# Altium PCB Tiny Mic.PcbDoc
Units mil, origin at the board's own origin, x right, y up, seen from the top; angles counter-clockwise.
Board outline 6000 x 4000 mil, 2 copper layers (Top Layer, Bottom Layer); 35 components, 28 nets, 157 pads, 0 vias.
Unrouted connection lines stored in the file: 82.
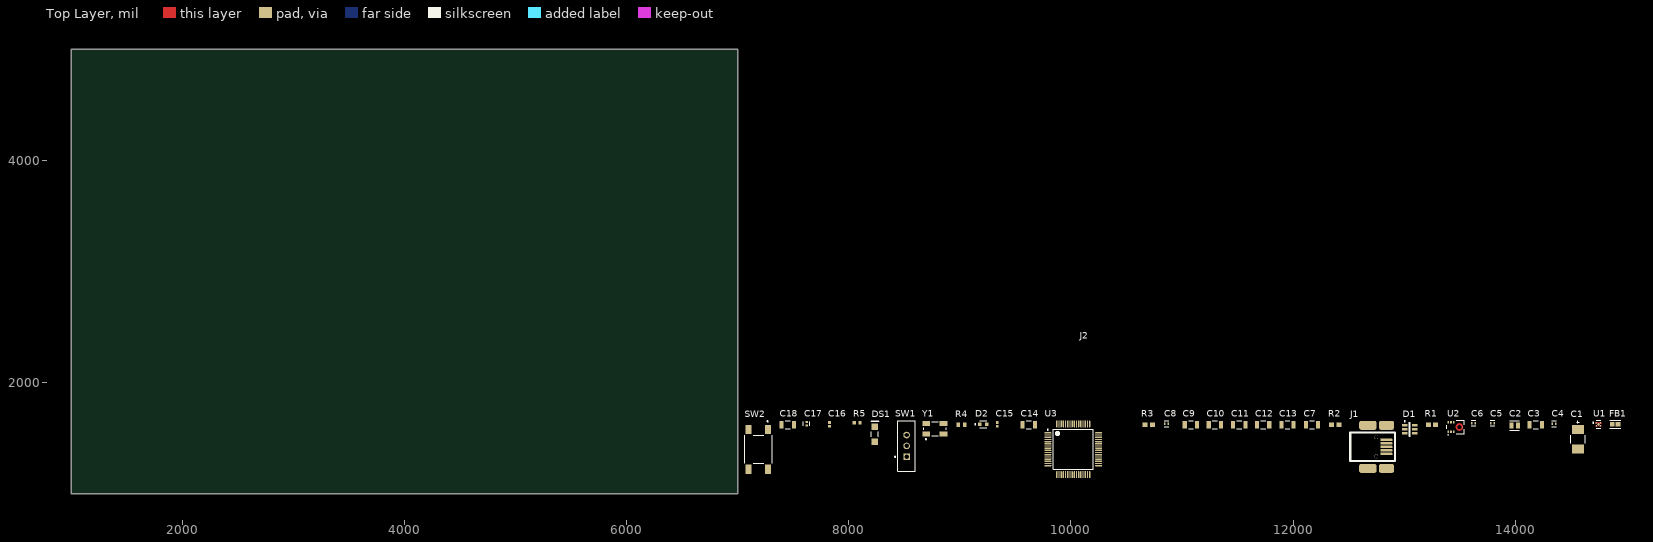
[diagram p0: Top Layer view]
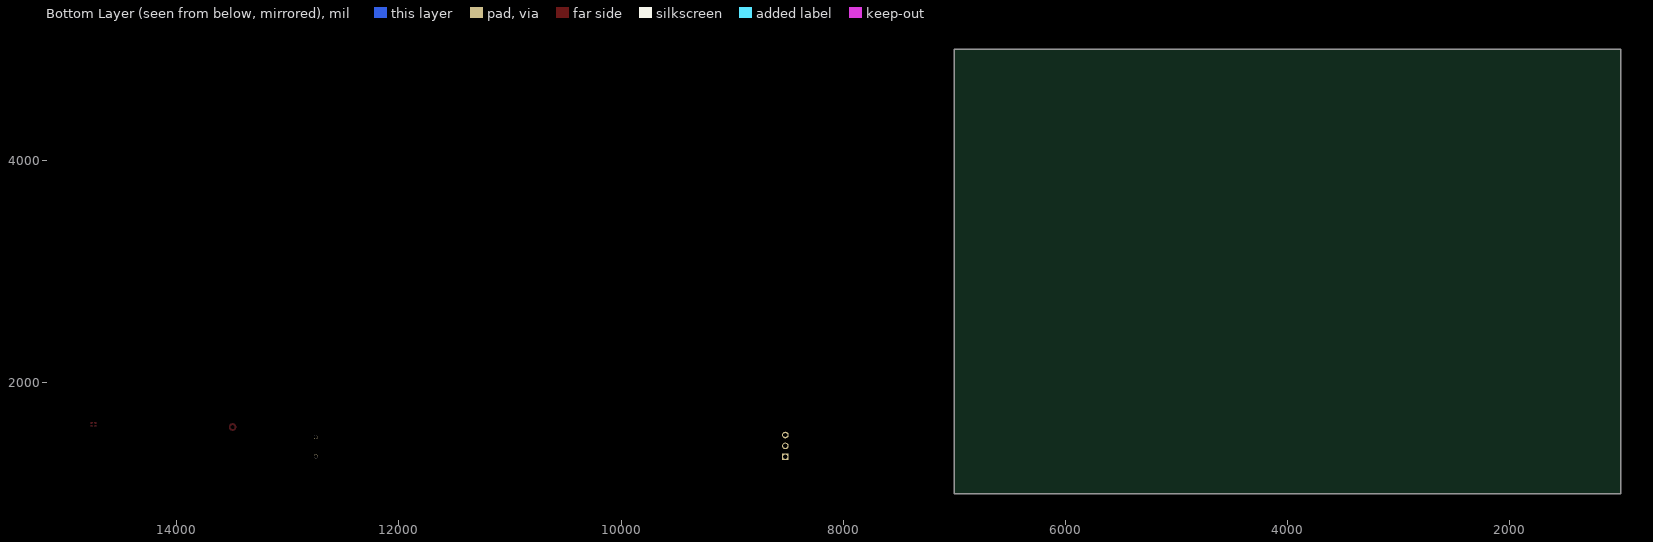
[diagram p1: Bottom Layer view, seen from below]

## Layer stack, top to bottom
Top Solder: solder mask 0.4, Solder Resist, Dk 3.5
Top Layer: signal copper 1.4
Dielectric 1: dielectric 12.6, FR-4, Dk 4.8
Bottom Layer: signal copper 1.4
Bottom Solder: solder mask 0.4, Solder Resist, Dk 3.5

## Board outline
1000,1000 7000,1000 7000,5000 1000,5000

## Design rules (kind name [scope] priority, off if disabled: settings)
Clearance [All] p1: gap=10 ignorepadtopadclearanceinfootprint=FALSE except(0: Arc-Hole Track-Hole SMDPad-Hole THPad-Hole Via-Hole Fill-Hole Poly-Hole Region-Hole Text-Hole)
PolygonConnect [All] p1: connectstyle=Relief reliefconductorwidth=10 reliefentries=4 polygonreliefangle="90 Angle" airgapwidth=10
RoutingVias [All] p1: holewidth=28 width=50 viastyle="Through Hole" minholewidth=28 minwidth=50 maxholewidth=28 maxwidth=50
SolderMaskExpansion [All] p1: expansion=4 istentingtop=FALSE
Width [All] p1: maxlimit=10 minlimit=10 preferedwidth=10
30 further rules are at their usual default settings.

## Components (designator, comment, footprint, x,y, rotation, side; value= is the part's Value field where it differs from the comment)
C1 "22uF" FP-TAJC-MFG 14565,1490 r90 top
C2 "10n" FP-C0805C-DN-MFG 13995,1615 r0 top value="10,000 pF"
C3 "100n" FP-C1206C-EB-MFG 14185,1620 r0 top value="0.10 μF"
C4 "4.7uF" FP-C1005-050-0_15-MFG 14350,1630 r0 top
C5 "1uF" FP-GRM15-0_1-MFG 13795,1635 r0 top
C6 "1uF" FP-GRM15-0_1-MFG 13625,1635 r0 top
C7 "100n" FP-C1206C-EB-MFG 12170,1620 r0 top value="0.10 μF"
C8 "4.7uF" FP-C1005-050-0_15-MFG 10860,1630 r0 top
C9 "100n" FP-C1206C-EB-MFG 11080,1620 r0 top value="0.10 μF"
C10 "100n" FP-C1206C-EB-MFG 11295,1620 r0 top value="0.10 μF"
C11 "100n" FP-C1206C-EB-MFG 11515,1620 r0 top value="0.10 μF"
C12 "100n" FP-C1206C-EB-MFG 11730,1620 r0 top value="0.10 μF"
C13 "100n" FP-C1206C-EB-MFG 11950,1620 r0 top value="0.10 μF"
C14 "100n" FP-C1206C-EB-MFG 9620,1620 r0 top value="0.10 μF"
C15 "22pF" CAPC1005X55X25NL05T10 9335,1625 r90 top
C16 "22pF" CAPC1005X55X25NL05T10 7825,1625 r90 top
C17 "4.7uF" FP-C1005-050-0_15-MFG 7620,1630 r90 top
C18 "100n" FP-C1206C-EB-MFG 7450,1620 r0 top value="0.10 μF"
D1 "ESD Protection" STM-SOT23-6L_V 13050,1580 r0 top
D2 "GREEN" FP-LTST-C190GKT-MFG 9210,1625 r0 top
DS1 "RED" AVAG-HSMX-C150_V 8235,1535 r90 top
FB1 "BLM18PG221SN1D" FP-BLM18-0_15-t0_8-IPC_B 14900,1625 r0 top
J1 "USB Connector" MOLX-67503-1020_V 12840,1485 r0 top
J2 "XHP-5" FP-XHP-5-MFG 10370,2245 r0 top
R1 "100k" RESC1609X55X30ML10T20 13250,1620 r0 top
R2 "100k" RESC1609X55X30ML10T20 12380,1620 r0 top
R3 "100k" RESC1609X55X30ML10T20 10700,1620 r0 top
R4 "150" RESC1608X55X25ML10T15 9015,1620 r0 top
R5 "330" RESC1608X55X30LL15T15 8075,1640 r0 top
SW1 "EG1218" ESWI-EG1218_V 8520,1430 r90 top
SW2 "" FP-FSM2JSMAA-MFG 7185,1400 r0 top
U1 "LP5907SNX-3.3/NOPB" FP-DQN0004A-MFG 14750,1625 r0 top
U2 "Low Noise Microphone" INSE-ICS-43432_V 13460,1600 r0 top
U3 "STM32F446RCT6" STM-LQFP64_L 10020,1400 r0 top
Y1 "ABM3B-8.000MHZ-B2-T" FP-ABM3B-MFG 8775,1585 r0 top

## Footprints (in the part's own frame and the unit in brackets; to place one, negate y for a bottom-side part, rotate by r counter-clockwise, add the part's x,y. Pads: shape width x height; smd on the part's side, far side on the other; paste and mask are expansions set on the pad)
AVAG-HSMX-C150_V [mm] "SMD, 2-Leads, Body 3.2x1.6mm"
  rect 1.5x1.5 smd: 1(-1.75,0) 2(1.75,0)
  silkscreen extent -0.6,-0.8 3,0.8, body extent -1.6,-0.8 1.6,0.8, height 1.1
CAPC1005X55X25NL05T10 [mm] "Chip Capacitor, 2-Leads, Body 1.00x0.50mm, IPC Medium Density"
  rect 0.66x0.62 smd: 1(-0.44,0) 2(0.44,0)
  body extent -0.53,-0.28 0.53,0.27, height 0.55
ESWI-EG1218_V [mm] "THD, 3-Leads, Body 11.6x4mm, Pitch 2.5mm"
  rect 1.5x1.5 hole 1: 1(-2.5,0)
  round 1.5 hole 1: 2(0,0) 3(2.5,0)
  silkscreen extent -5.8,-2 5.8,2.77, body extent -5.8,-2 5.8,2, height 7.4
FP-ABM3B-MFG [mm]
  rect 1.8x1.2 smd paste+0 mask+0: 1(-2,-1.2) 2(2,-1.2) 3(2,1.2) 4(-2,1.2)
  silkscreen extent -2.55,-2.5 2.55,1.65, body extent -3,-1.9 3,1.9, height 0.25
FP-BLM18-0_15-t0_8-IPC_B [mil]
  rect 43.55x37.73 smd paste+0 mask+0: 1(-26.62,0) 2(26.62,0)
  silkscreen extent -48,-35 48,35, body extent -58,-29 58,29, height 10
FP-C0805C-DN-MFG [mm]
  rect 0.95x1.35 smd paste+0 mask+0: 1(-0.75,0) 2(0.75,0)
  silkscreen extent -1.1,-1.07 1.1,1.07, body extent -1.4,-0.85 1.4,0.85, height 0.25
FP-C1005-050-0_15-MFG [mm]
  rect 0.4x0.5 smd paste+0 mask+0: 1(-0.4,0) 2(0.4,0)
  silkscreen extent -0.5,-0.72 0.5,0.72, body extent -0.7,-0.43 0.7,0.43, height 0.25
FP-C1206C-EB-MFG [mm]
  rect 0.95x1.7 smd paste+0 mask+0: 1(-1.4,0) 2(1.4,0)
  silkscreen extent -0.55,-0.9 0.55,0.9, body extent -2,-1 2,1, height 0.25
FP-DQN0004A-MFG [mm]
  round 0.279 smd paste-1000 mask-1000: 1(-0.505,0.33) 2(-0.505,-0.33)
  round 0.251 smd paste-1000 mask-1000: 3(0.459,-0.346) 4(0.459,0.346)
  rect 0.58x0.58 smd rot 135 paste-1000 mask-1000: 5(0,0)
  Top Layer region: -0.66,-0.485 -0.2,-0.485 -0.2,-0.385 -0.41,-0.175 -0.66,-0.175
  Top Layer region: 0.66,0.485 0.2,0.485 0.2,0.385 0.41,0.175 0.66,0.175
  Top Layer region: 0.66,-0.485 0.2,-0.485 0.2,-0.385 0.41,-0.175 0.66,-0.175
  Top Layer region: -0.66,0.485 -0.2,0.485 -0.2,0.385 -0.41,0.175 -0.66,0.175
  silkscreen extent -1.35,-0.9 0.53,0.9, body extent -0.76,-0.63 0.76,0.63, height 0.25
FP-FSM2JSMAA-MFG [mm]
  rect 1.38x2.1 smd paste+0 mask+0: 1(2.25,4.55) 2(2.24,-4.55) 3(-2.24,4.55) 4(-2.24,-4.55)
  silkscreen extent -3.15,-3.15 3.15,6.5, body extent -3.25,-5.7 3.25,5.7, height 0.25
FP-GRM15-0_1-MFG [mm]
  rect 0.4x0.5 smd paste+0 mask+0: 1(-0.4,0) 2(0.4,0)
  silkscreen extent -0.55,-0.63 0.55,0.63, body extent -0.7,-0.38 0.7,0.38, height 0.25
FP-LTST-C190GKT-MFG [mm]
  rect 0.8x0.8 smd paste+0 mask+0: 1(-0.75,0) 2(0.75,0)
  silkscreen extent -1.92,-0.85 0.85,0.85, body extent -1.25,-0.55 1.25,0.55, height 0.25
FP-TAJC-MFG [mm]
  rect 2x2.8 smd paste+0 mask+0: 1(-2.25,0) 2(2.25,0)
  silkscreen extent -0.87,-1.7 4.23,1.7, body extent -3.35,-1.8 3.35,1.8, height 0.25
FP-XHP-5-MFG [mil]
  body extent -295,-116 295,116, height 10
INSE-ICS-43432_V [mm] "SMD, 7-Leads, Body 4x3mm, Pitch 0.65mm"
  rect 0.4x0.6 smd paste-0.05: 1(-1.625,-1.075) 2(-0.975,-1.075) 3(-0.325,-1.075) 5(-0.325,1.075) 6(-0.975,1.075) 7(-1.625,1.075)
  round 0.2 smd paste-0.5: 4(1.625,0)
  round 0.2 hole 0.5 unplated: 8(0.95,0)
  Top Layer region: 0.95,-0.825 0.592,-0.743 0.305,-0.514 0.146,-0.184 0.146,0.184 0.305,0.514 0.592,0.743 0.95,0.825 0.95,0.825 0.95,0.525 0.722,0.473 0.54,0.327 0.438,0.117 0.438,-0.117 0.54,-0.327 0.722,-0.473 0.95,-0.525 0.95,-0.525
  Top Layer region: 0.95,-0.825 1.308,-0.743 1.595,-0.514 1.754,-0.184 1.754,0.184 1.595,0.514 1.308,0.743 0.95,0.825 0.95,0.825 0.95,0.525 1.178,0.473 1.36,0.327 1.462,0.117 1.462,-0.117 1.36,-0.327 1.178,-0.473 0.95,-0.525 0.95,-0.525
  silkscreen extent -1.95,-1.82 2.05,1.5, body extent -1.95,-1.5 2.05,1.5, height 1.1
MOLX-67503-1020_V [mm] "Mini USB Connector, SMT, Righer Angle"
  rrect50% 2.8x0.5 smd: 1(0,0) 2(0,-0.8) 3(0,-1.6) 4(0,-2.4) 5(0,-3.2)
  rrect50% 3.5x2.05 smd: 6(0.025,3.325) 8(0.025,-6.525)
  rrect50% 4x2.05 smd: 7(-4.225,3.325) 9(-4.225,-6.525)
  round 0.9 hole 0.9 unplated: X(-2.325,-3.8) Y(-2.325,0.6)
  silkscreen extent -8.25,-4.85 2,1.65, body extent -8.22,-6.56 0.78,3.34, height 3.95
RESC1608X55X25ML10T15 [mm] "Chip Resistor, 2-Leads, Body 1.70x0.90mm, IPC Low Density"
  rect 0.8x1 smd: 1(-0.75,0) 2(0.75,0)
  body extent -0.85,-0.45 0.85,0.45, height 0.55
RESC1608X55X30LL15T15 [mm] "Chip Resistor, 2-Leads, Body 1.75x0.95mm, IPC High Density"
  rect 0.75x0.85 smd: 1(-0.65,0) 2(0.65,0)
  body extent -0.87,-0.48 0.87,0.48, height 0.55
RESC1609X55X30ML10T20 [mm] "Chip Resistor, 2-Leads, Body 1.60x0.85mm, IPC Low Density"
  rect 1.15x1.05 smd: 1(-0.825,0) 2(0.825,0)
  body extent -0.85,-0.48 0.85,0.48, height 0.55
STM-LQFP64_L [mm] "QFP, 64-Leads, Body 10x10mm, Pitch 0.5mm, IPC High Density"
  oval 1.6x0.3 smd: 1(-5.8,3.75) 2(-5.8,3.25) 3(-5.8,2.75) 4(-5.8,2.25) 5(-5.8,1.75) 6(-5.8,1.25) 7(-5.8,0.75) 8(-5.8,0.25) 9(-5.8,-0.25) 10(-5.8,-0.75) 11(-5.8,-1.25) 12(-5.8,-1.75) 13(-5.8,-2.25) 14(-5.8,-2.75) 15(-5.8,-3.25) 16(-5.8,-3.75) 33(5.8,-3.75) 34(5.8,-3.25) 35(5.8,-2.75) 36(5.8,-2.25) 37(5.8,-1.75) 38(5.8,-1.25) 39(5.8,-0.75) 40(5.8,-0.25) 41(5.8,0.25) 42(5.8,0.75) 43(5.8,1.25) 44(5.8,1.75) 45(5.8,2.25) 46(5.8,2.75) 47(5.8,3.25) 48(5.8,3.75)
  oval 0.3x1.6 smd: 17(-3.75,-5.8) 18(-3.25,-5.8) 19(-2.75,-5.8) 20(-2.25,-5.8) 21(-1.75,-5.8) 22(-1.25,-5.8) 23(-0.75,-5.8) 24(-0.25,-5.8) 25(0.25,-5.8) 26(0.75,-5.8) 27(1.25,-5.8) 28(1.75,-5.8) 29(2.25,-5.8) 30(2.75,-5.8) 31(3.25,-5.8) 32(3.75,-5.8) 49(3.75,5.8) 50(3.25,5.8) 51(2.75,5.8) 52(2.25,5.8) 53(1.75,5.8) 54(1.25,5.8) 55(0.75,5.8) 56(0.25,5.8) 57(-0.25,5.8) 58(-0.75,5.8) 59(-1.25,5.8) 60(-1.75,5.8) 61(-2.25,5.8) 62(-2.75,5.8) 63(-3.25,5.8) 64(-3.75,5.8)
  silkscreen extent -5.92,-4.6 4.6,4.6, body extent -5,-5 5,5, height 1.6
STM-SOT23-6L_V [mm] "SOT23, 6-Leads, Body 3.05x1.75mm, Pitch 0.95mm"
  rect 1.2x0.6 smd: 1(-1.15,0.95) 2(-1.15,0) 3(-1.15,-0.95) 4(1.15,-0.95) 5(1.15,0) 6(1.15,0.95)
  silkscreen extent -1.27,-1.55 0.15,1.92, body extent -1.6,-1.53 1.6,1.53, height 1.45

## Part data
C1: library part CMP-04424-000242-1, "22uF 25V  ±10% 1.4Ω 2312  SMD Tantalum Capacitor  TAJC226K025RNJ", Case Code (Imperial)=2312, Case Code (Metric)=6032, Case/Package=2412, Dielectric Material=Tantalum, ESR (Equivalent Series Resistance)=1.4R, Leakage Current=5.5uA, Max Operating Temperature=125°C, Min Operating Temperature=-55°C, Package Quantity=1, Tolerance=10%, Voltage=25V, Capacitance=22uF, Construction=Flat, Depth=3.2mm, Dissipation Factor=6%, Features="General Purpose", Height=2.6mm, Height - Seated (Max)=0.11inch, Lead Free="Lead Free", Length=6mm, Mount="Surface Mount", Number of Pins=2, Packaging="Tape and Reel", Polarity=Polar, Radiation Hardening=No, REACH SVHC="No SVHC", RoHS Compliant=Yes, Series=TAJ, Termination=SMD/SMT, Voltage Rating=25V, Voltage Rating (DC)=25V, Width=3.2mm
C2: library part CMP-2007-00259-2, "CAP CER 10000PF 200V X7R 0805 C0805C103K2RACTU", Capacitance="10,000 pF", Manufacturer=KEMET, Manufacturer Part Number=C0805C103K2RACTU, Package=C0805C-DN, Temperature="-55°C to +125°C", Temperature Characteristic=X7R, Temperature Coefficient=30ppm/°C, Temperature Range High=+125°C, Temperature Range Low=-55°C, Tolerance=0.1, Voltage Rating="200 V", Automotive=No, Category=Cap, ComponentLink2Description=Datasheet, ComponentLink2URL=https://content.kemet.com/datasheets/KEM_C1003_C0G_SMD.pdf, Device Class L1="Passive Components", Device Class L2=Capacitors, Device Class L3="Ceramic Capacitors", Digikey Description="CAP CER 10000PF 200V X7R 0805", Height=0.88mm, Ipc Land Pattern Name=CAPC200125X78, Lead Free=Yes, Material=Ceramic, Mouser Description="KEMET - C0805C103K2RACTU - CAP, MLCC, X7R, 10NF, 200V, 0805", Octopart=https://octopart.com/c0805c103k2ractu-kemet-9138347, RoHS=TRUE
C3 C7 C9 C10 C11 C12 C13 C14 C18: library part CMP-1037-04222-2, "CAP CER 0.1UF 200V 10% X7R 1206 C1206C104K2RACTU", Capacitance="0.10 μF", Manufacturer=KEMET, Manufacturer Part Number=C1206C104K2RACTU, Package=C1206C-EB, Temperature="-55°C to +150°C", Temperature Characteristic=X7R, Temperature Coefficient=15%, Temperature Range High=+150°C, Temperature Range Low=-55°C, Tolerance=0.1, Voltage Rating="200 V", Automotive=Yes, Automotive Grade="Grade 0", Category=Cap, ComponentLink2Description=Datasheet, ComponentLink2URL=https://content.kemet.com/datasheets/KEM_C1007_X8R_ULTRA_150C_SMD.pdf, Device Class L1="Passive Components", Device Class L2=Capacitors, Device Class L3="Ceramic Capacitors", Digikey Description="CAP CER 0.1UF 200V 10% X7R 1206", Height=0.88mm, Ipc Land Pattern Name=CAPC320160X78, Lead Free=Yes, Material=Ceramic, Mouser Description="Multilayer Ceramic Capacitors MLCC - SMD/SMT 200volts 0.1uF X7R 10%", Octopart=https://octopart.com/c1206c104k2ractu-kemet-9138344, RoHS=TRUE
C4 C8 C17: library part CMP-2000-05997-2, "CAP CER 4.7UF 10V X5R 0402 C1005X5R1A475K050BC", Case Code (Imperial)=0402, Case Code (Metric)=1005, Dielectric=X5R, Dielectric Material=Ceramic, Max Operating Temperature=85°C, Min Operating Temperature=-55°C, Package Quantity=10000, Tolerance=10%, Voltage Rating=10V, Capacitance=4.7uF, Case/Package=0402, Lead Free="Lead Free", Length=0.039inch, Mount="Surface Mount", Packaging="Cut Tape", REACH SVHC="No SVHC", RoHS Compliant=Yes, Series=C, Thickness=0.022inch, Voltage Rating (DC)=10V, Width=0.02inch
C5 C6: library part CMP-2008-04556-2, "CAP CER 1UF 10V X5R 0402 GRM155R61A105KE15D", Manufacturer=Murata, Manufacturer Part Number=GRM155R61A105KE15D, Package=GRM15-0.1, Temperature="-55°C to +85°C", Temperature Characteristic=X5R, Temperature Coefficient=15%, Temperature Range High=+85°C, Temperature Range Low=-55°C, Tolerance=10%, Voltage Rating=10V, Automotive=No, Capacitance=1uF, Category=Cap, ComponentLink2Description=Datasheet, ComponentLink2URL=https://search.murata.co.jp/Ceramy/image/img/A01X/G101/ENG/GRM155R61A105KE15-01A.pdf, Device Class L1="Passive Components", Device Class L2=Capacitors, Device Class L3="Ceramic Capacitors", Digikey Description="CAP CER 1UF 10V X5R 0402", Height=0.55mm, Ipc Land Pattern Name=CAPC10050X50, Lead Free=Yes, Material=Ceramic, Mouser Description="0402 1 uF 10 V ±10% Tolerance X5R Surface Mount Multilayer Ceramic Capacitor", Octopart=https://octopart.com/grm155r61a105ke15d-murata-197442, RoHS=TRUE
C15 C16: library part CMP-2008-04304-1, "GRM1555C1H220JZ01D", Manufacturer=Murata, Part Number=GRM1555C1H220JZ01D
D1: library part CMP-2000-05378-1, "Very low capacitance ESD protection, 3.5 pF, -40 to 125 degC, 6-Pin SOT23, RoHS, Tape and Reel USBLC6-2SC6", Capacitance Value=3.5pF, Clamping Voltage=17V, Leakage Current=0.15uA, Manufacturer=STMicroelectronics, Operating Temp Range=-40Cto125C, Operating Temperature Classification=Automotive, Operating Temperature Max Deg. C=125C, Operating Temperature Min Deg. C=-40C, Package / Case=SOT-23, Package Description="6-Pin Small Outline Transistor, Body 2.925 x 1.625 mm, Pitch 0.95 mm", Package Reference=SOT23-6L, Peak Pulse Current=5A, Reverse Breakdown Voltage=6V, Reverse Stand-off Voltage=5V, Test Current (It)=1mA, Clamping Voltage (Max)=17V, Configuration=Dual, Datasheet URL=http://www.st.com/st-web-ui/static/active/en/resource/technical/document/datasheet/CD00050750.pdf, Datasheet Version="Rev. 5, 10/2011", Direction Type=Uni-Directional, Leakage Current (Max)=0.15uA, Manufacturer URL=http://www.st.com/, Mounting=SurfaceMount, Mounting Style=SurfaceMount, Number of Elements=1, Packaging=TapeandReel, Pin Count=6, Polarity=Uni-Directional, Product Depth (mm)=1.75mm, Product Height (mm)=1.3mm, Product Length (mm)=3.05mm, Rad Hardened=No, Suppressor Type=DiodeArrays, Working Voltage=5V, Working Voltage (Max)=5V
D2: library part CMP-22017-000005-2, "LED GREEN CLEAR CHIP SMD LTST-C190GKT", Case Code (Imperial)=0603, Case Code (Metric)=1608, Color=Green, Forward Current=30mA, Forward Voltage=2.1V, Lens Color=Colorless, Max Operating Temperature=85°C, Min Operating Temperature=-55°C, Package Quantity=1, Power Dissipation=100mW, Reverse Voltage=5V, Test Current=10mA, Voltage=2V, Case/Package=0603, Depth=0.8mm, Dominant Wavelength=569nm, Height=0.8mm, Illumination Color=Green, Lead Free="Lead Free", Length=1.6mm, Lens Style=Clear, Lens Transparency=Clear, Luminous Intensity=6mcd, Mount="Surface Mount", Number of Elements=1, Number of LEDs=1, Number of Pins=2, Packaging="Tape and Reel", Power Rating=100mW, Radiation Hardening=No, Viewing Angle=130°, Wavelength=565nm, Width=0.8mm
DS1: library part CMP-2000-06426-1, "LED Uni-Color Red, 65 mW, 25 mA, -40 to 85 degC, 2-Pin SMD, RoHS, Tape and Reel HSMH-C150", Emitting Color=Red, Forward Current=25mA, Forward Voltage=2.6V, Manufacturer=Avago, Operating Temp Range=-40Cto85C, Operating Temperature Classification=Industrial, Package Description="2-Pin Surface Mount Device, Body 3.2 x 1.6 mm", Package Reference=HSMX-C150, Package Type=ChipLed, Power Dissipation=78W, Reverse Voltage=5V, Test Current (It)=20mA, Chip Material=GaAlAs, Datasheet URL=http://media.digikey.com/pdf/Data%20Sheets/Avago%20PDFs/HSMz-Czzz.pdf, Datasheet Version=03/2012, DELETED=Compliant, Dominant Wave Length=639nm, High Brightness=No, Lens Dimensions=2x1.6x0.6mm, Lens Type=ColorlessDiffused, Lum Intensity=17mcd, Luminous Intensity=17mcd, Main Category=ChipLED, Manufacturer URL=http://www.avagotech.com/, Mounting=SurfaceMount, Mounting Technology=SurfaceMount, Number of  Elements=1, Packaging=TapeandReel, Peak Wavelength=660nm, Pin Count=2, Product Depth (mm)=1.6mm, Product Height (mm)=1.1mm, Product Length (mm)=3.2mm, Rad Hardened=No, Shape Type=Rectangular, Type=Uni-Color, Viewing Angle=170deg
FB1: library part CMP-0686-00569-3, "Chip Ferrite Bead, 0603, 220Ω @ 100MHz, 0.1Ω, 25%, 1.4A", Case Code (Imperial)=0603, Case Code (Metric)=1608, Current Rating=1.4A, DC Resistance (DCR)=100mR, ESR (Equivalent Series Resistance)=220R, Manufacturer Series=BLM18P, Max Operating Temperature=125°C, Min Operating Temperature=-55°C, Package Quantity=1, Test Frequency=100MHz, Tolerance=25%, Case/Package=0603, Core Material=Ferrite, DC Current=1.4A, DC Resistance-Max=100mR, Depth=0.8mm, Height=0.8mm, Impedance=220R, Lead Free="Lead Free", Length=1.6mm, Material=Steel, Max Current Rating=1.4A, Max DC Current=1.4A, Number of Circuits=1, Number of Functions=1, Number of Lines=1, Number of Pins=2, Packaging="Tape and Reel", Radiation Hardening=No, REACH SVHC="No SVHC", Resistance=100mR, RoHS Compliant=Yes, Series=BLM18P, Shielding=Unshielded, Termination=SMD/SMT, Weight=7.1E-05oz, Width=0.8mm
J1: library part CMP-0411-00002-1, "USB, MINI, SMD, RA KME04-USBMU03A01 67503-1020", Manufacturer=Molex, PartNumber=67503-1020, ComponentLink1Description="Manufacturer URL", ComponentLink1URL=http://www.molex.com/, ComponentLink2Description=Datasheet, ComponentLink2URL=http://www.molex.com/pdm_docs/sd/675031020_sd.pdf, DatasheetVersion="Rev F, 06/2009", Mounting Technology="Surface Mount", PackageDescription="Mini USB Connector, SMT, Righer Angle", PackageReference=67503-1020, Terminal Pitch="0.8 mm"
J2: library part CMP-17439-000071-1, "CONN HOUSING 2.5MM 5POS", Color=Natural, Contact Resistance=10mR, Current Rating=3A, Housing Color=White, Insulation Resistance=1GR, Max Operating Temperature=85°C, Max Voltage Rating (AC)=250V, Min Operating Temperature=-25°C, Connector Type=Receptacle, Contact Material=Bronze, Contact Type="Female Socket", Depth=7.75mm, Gender=Receptacle, Height=0.25inch, Housing Material=Polyamide, Lead Free="Lead Free", Lead Pitch=2.5mm, Length=14.8mm, Max Current Rating=3A, Max Voltage Rating (DC)=250V, Mount="Free Hanging", Number of Contacts=5, Number of Positions=5, Number of Rows=1, Orientation=Straight, Packaging=Bag, Pitch=2.5mm, REACH SVHC="No SVHC", Series=XH, Termination=Crimp, Voltage Rating (AC)=250V, Weight=0.0625lb, Width=5.7mm, Wire Gauge (Max)=30AWG, Wire Gauge (Min)=22AWG, Wire/Cable Gauge=22AWG
R1 R2 R3: library part CMP-2000-03686-1, "TNPW0603100KBEEN", Manufacturer="Vishay Dale", Part Number=TNPW0603100KBEEN
R4: library part CMP-1659-00057-1, "Chip Resistor, 150 Ohm, +/- 1%, 0.1 W, -55 to 155 degC, 0603 (1608 Metric), RoHS, Tape and Reel RC0603FR-07150RL", Case\Package=Radial, Colour=Green, Forward Voltage="2.2 V", Package Quantity=1000, ComponentLink1Description="Manufacturer URL", ComponentLink1URL=http://www.yageo.com/, ComponentLink2Description=Datasheet, ComponentLink2URL=http://www.yageo.com/documents/recent/PYu-RC_Group_51_RoHS_L_04.pdf, DatasheetVersion="Rev. 4, 02/2016", Height="8.6 mm", Illumination Colour=Green, Lens Style=Clear, Luminous Intensity="200 mcd", Mount="Through Hole", Nominal Vf="2.2 V", PackageDescription="2-Pin Surface Mount Device, Body 1.6 x 0.8 mm", PackageReference=0603, Packaging=Bulk, RoHSCompliant=true, Viewing Angle="20 degrees"
R5: library part CMP-2000-00435-2, "Chip Resistor, 330 Ohm, +/- 1%, 0.1 W, -55 to 155 degC, 0603 (1608 Metric), RoHS, Tape and Reel ERJ-3EKF3300V", Current Rating="500 mA", Max Operating Temperature="85 degC", Min Operating Temperature="-25 degC", Package Quantity=1500, Voltage Rating="10 V", ComponentLink1Description="Manufacturer URL", ComponentLink1URL=http://www.panasonic.com/, ComponentLink2Description=Datasheet, ComponentLink2URL=http://industrial.panasonic.com/cdbs/www-data/pdf/RDA0000/AOA0000C86.pdf, Contact Finish=Gold, Contact Material=Copper, Contact Plating=Gold, DatasheetVersion=Apr-15, Gender=Male, Height="1.45 mm", Lead Pitch="1.1 mm", Length="13.7 mm", Mating Cycles=10000, Mount="Surface Mount", PackageDescription="2-Pin Surface Mount Device, Body 1.6 x 0.85 mm", PackageReference=0603, Packaging="Tape and Reel", Pins=8, REACH SVHC="No SVHC", RoHSCompliant=true, Width="1.45 mm"
SW1: library part CMP-1696-00002-1, "Slide Switch, 500 V, -20 to 70 degC, 3-Pin THD, RoHS", Case\Package=SOT-23-5, Dropout Voltage="300 mV", Max Input Voltage="8 V", Max Operating Temperature="85 degC", Max Ouput Current="150 mA", Max Power Dissipation="250 mW", Min Input Voltage="4.3 V", Min Operating Temperature="-40 degC", Nominal Output Voltage="3.3 V", Package Quantity=3000, ComponentLink1Description="Manufacturer URL", ComponentLink1URL=http://www.e-switch.ch/en/, ComponentLink2Description=Datasheet, ComponentLink2URL=https://www.e-switch.com/system/asset/product_line/data_sheet/119/EG.pdf, DatasheetVersion=Oct-15, Height="1.3 mm", Length="3 mm", Mount="Surface Mount", Output Current="150 mA", Output Voltage="3.3 V", Outputs=1, PackageDescription="3-Pin Through Hole Device, Body 11.6 x 4 mm, Pitch 2.5 mm", PackageReference=EG1218, Packaging="Tape and Reel", Pins=5, Power Rating="250 mW", Radiation Hardening=No, REACH SVHC="No SVHC", RoHSCompliant=true, Width="1.8 mm"
SW2: library part CMP-03402-000003-1, "SWITCH TACTILE SPST-NO 0.05A 24V FSM2JSMAA", Contact Current Rating=50mA, Contact Resistance=100mΩ, Manufacturer="TE Connectivity", Manufacturer Part Number=FSM2JSMAA, Operating Force=260gf, Package=0, Temperature="-35°C to +85°C", Temperature Range High=+85°C, Temperature Range Low=-35°C, Voltage Rating Dc=24V, Automotive=No, Category=Switch, ComponentLink2Description=Datasheet, ComponentLink2URL=https://www.te.com/commerce/DocumentDelivery/DDEController?Action=showdoc&DocId=Customer+Drawing%7F2-1437565-7%7FV%7Fpdf%7FEnglish%7FENG_CD_2-1437565-7_V.pdf%7F2-1437565-8, Device Class L1=Electromechanical, Device Class L2=Switches, Device Class L3="Pushbutton Switches", Digikey Description="SWITCH TACTILE SPST-NO 0.05A 24V", Electromechanical Life=100000Cycles, Height=4.59mm, Lead Free=Yes, Mount="Surface Mount", Mouser Description="Tactile Switches TACTILE 260G FORCE S", Octopart=https://octopart.com/fsm2jsmaa-te+connectivity-41720620, RoHS=TRUE, Standoff Height=0.05mm, Throw Configuration=SPST-NO
U1: library part CMP-04917-000059-2, "None", Dropout Voltage=250mV, Max Input Voltage=5.5V, Max Operating Temperature=125°C, Max Output Current=250mA, Min Input Voltage=2.2V, Min Operating Temperature=-40°C, Nominal Output Voltage=3.3V, Output Voltage Accuracy=2%, Power Supply Rejection Ratio (PSRR)=82dB, Quiescent Current=250uA, Accuracy=2%, Contact Plating=Gold, Lead Free="Lead Free", Mount="Surface Mount", Number of Outputs=1, Number of Pins=4, Number of Regulators=1, Output Current=250mA, Output Type=Fixed, Output Voltage=3.3V, Packaging="Tape and Reel", Polarity=Positive, Radiation Hardening=No, REACH SVHC="No SVHC", RoHS Compliant=Yes, Tolerance=2%
U2: library part CMP-2000-06439-1, "Low Noise Microphone with I2S Digital Output, 1 mA, -40 to 85 degC, 7-Pin SMD, RoHS, Tape and Reel ICS-43432", Current - Supply=1.5mA, Frequency Range=50Hz~20kHz, Manufacturer=InvenSense, Package Description="7-Pin Surface Mount Device, Body 4 x 3 mm, Pitch 0.65 mm, Height 1.1 mm", Package Reference=ICS-43432, Seal Rating=None, Voltage - Rated=-, Voltage Range=1.62~3.63V, Category=AudioProducts, Datasheet URL=https://www.invensense.com/wp-content/uploads/2015/02/ICS-43432-data-sheet-v1.3.pdf, Datasheet Version="Rev. 1.3, 04/2016", Direction=Omnidirectional, Family=Microphones, Height (Max)=1.10mm, Impedance=-, Manufacturer URL=http://www.invensense.com/, Mounting Technology=SurfaceMount, Output Type=Digital,I²S, Packaging=Tape&amp;Reel(TR), Port Location=Bottom, S/N Ratio=65dB, Sensitivity=-26dB±1dB@94dBSPL, Series=-, Shape=Rectangular, Size / Dimension=4.00mmLx3.00mmW, Termination=SolderPads, Type=MEMS(Silicon)
U3: library part CMP-0243-00216-1, "ARM Cortex-M4 32-bit MCU+FPU, 256 KB Flash, 128 KB Internal RAM, 50 I/Os, 64-Pin LQFP, -40 to 85 degC, Tray", I/Os (High Current)=50, Operating Frequency(F) (Processor speed) (MHz)=180, Package Description=LQFP64, Package Reference="64-Pin Low-profile Quad Flat Package, Body 10 x 10 mm, Pitch 0.5 mm", Supply Voltage(Vcc) min (V)=1.7, ComponentLink1Description="Manufacturer URL", ComponentLink1URL=http://www.st.com/, ComponentLink2Description=Datasheet, ComponentLink2URL=http://www.st.com/st-web-ui/static/active/en/resource/technical/document/datasheet/DM00141306.pdf, Core="ARM Cortex-M4", D/A Converter=2, DatasheetVersion="Rev. 6", FLASH Size (Prog) (kB)=256, Internal RAM Size (kB)=128, Mounting Technology="Surface Mount", Packing=Tray
Y1: library part CMP-1688-00002-2, "Crystal 8MHz ±20ppm 18pF SMD-4 5mm x 3.2mm", Case/Package=CSMD, ESR (Equivalent Series Resistance)=200R, Frequency=8MHz, Frequency Stability=50ppm, Frequency Tolerance=20ppm, Load Capacitance=18pF, Max Operating Temperature=70°C, Min Operating Temperature=-20°C, Operating Frequency="8 MHz", Package Quantity=1000, Resistor Type=Ceramic, Depth=3.2mm, Height=0.043inch, Lead Free="Lead Free", Length=5mm, Mount="Surface Mount", Number of Pins=4, Packaging="Tape and Reel", Series=ABM3B, Series Resistance=200R, Termination=SMD/SMT, Tolerance=20ppm, Width=0.126inch

## Nets (pads, with @x,y where several pads share a name; then routed paths per layer and width w, separated by ;. In a path a pad name is that pad's centre, name@x,y a point inside that pad or via, vN(x,y) a via of type N, cw(c..) or ccw(c..) an arc to the next point about the centre after c; other vN are vias at no path point)
+5: C1.2 C3.1 C4.1 C6.1 D1.3 FB1.2 U1.3 U1.4
GND: C1.1 C2.2 C3.2 C4.2 C7.2 C8.2 C9.2 C10.2 C11.2 C12.2 C13.2 C14.2 C15.2 C16.2 C17.2 D1.4 J1.5 J1.6 R1.1 R2.1 R3.2 R4.2 R5.2 SW1.2 SW2.2 U2.4 U3.12 U3.18 U3.31 U3.47 U3.60 U3.63
NetC2_1: C2.1 FB1.1 J1.1
NetC5_2: C5.2 C6.2 U1.2
NetC15_1: C15.1 U3.5 Y1.1
NetC16_1: C16.1 U3.6 Y1.2 Y1.3 Y1.4
NetC17_1: C17.1 U3.30
NetC18_1: C18.1 SW2.3 U3.7
NetC18_2: C18.2 SW2.1
NetD1_1: D1.1 J1.2
NetD1_2: D1.2 J1.3
NetD1_5: D1.5 U3.45
NetD1_6: D1.6 U3.44
NetD2_1: D2.1 R4.1
NetDS1_2: DS1.2 R5.1
NetJ1_4: J1.4 R3.1
NetR1_2: R1.2 U2.1 U3.27
NetR2_2: R2.2 U2.7 U3.23
NetSW1_3: SW1.3 U3.16
NetSW2_4: SW2.4
NetU2_5: U2.5 U3.20
NetU2_6: U2.6 U3.21
NetU3_33: U3.33
NetU3_34: U3.34
NetU3_40: U3.40
NetU3_46: U3.46
NetU3_49: U3.49
VDD: C5.1 C7.1 C8.1 C9.1 C10.1 C11.1 C12.1 C13.1 C14.1 U1.1 U2.3 U3.1 U3.13 U3.19 U3.32 U3.48 U3.64
pads on no net: D2.2 DS1.1 J1.7 J1.8 J1.9 J1.X J1.Y SW1.1 U1.5 U2.2 U2.8 U3.2 U3.3 U3.4 U3.8 U3.9 U3.10 U3.11 U3.14 U3.15 U3.17 U3.22 U3.24 U3.25 U3.26 U3.28 U3.29 U3.35 U3.36 U3.37 U3.38 U3.39 U3.41 U3.42 U3.43 U3.50 U3.51 U3.52 U3.53 U3.54 U3.55 U3.56 U3.57 U3.58 U3.59 U3.61 U3.62